# Altium PCB PCB1.PcbDoc
Units mm, origin at the board's own origin, x right, y up, seen from the top; angles counter-clockwise.
Board outline 26.5 x 80.6 mm, 2 copper layers (Top Layer, Bottom Layer), stack 0.571 mm thick; 10 components, 17 nets, 92 pads, 22 vias.
Unrouted connection lines stored in the file: 3.
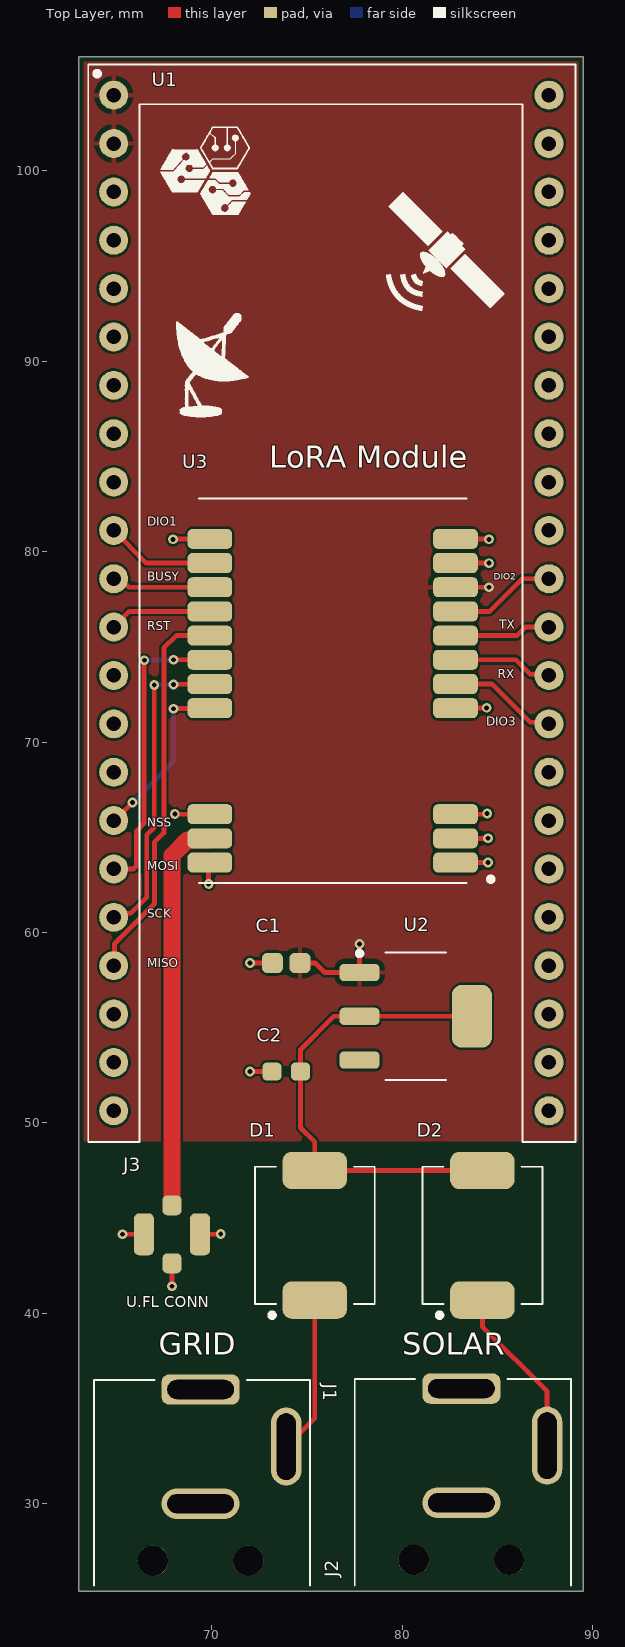
[diagram p0: Top Layer view]
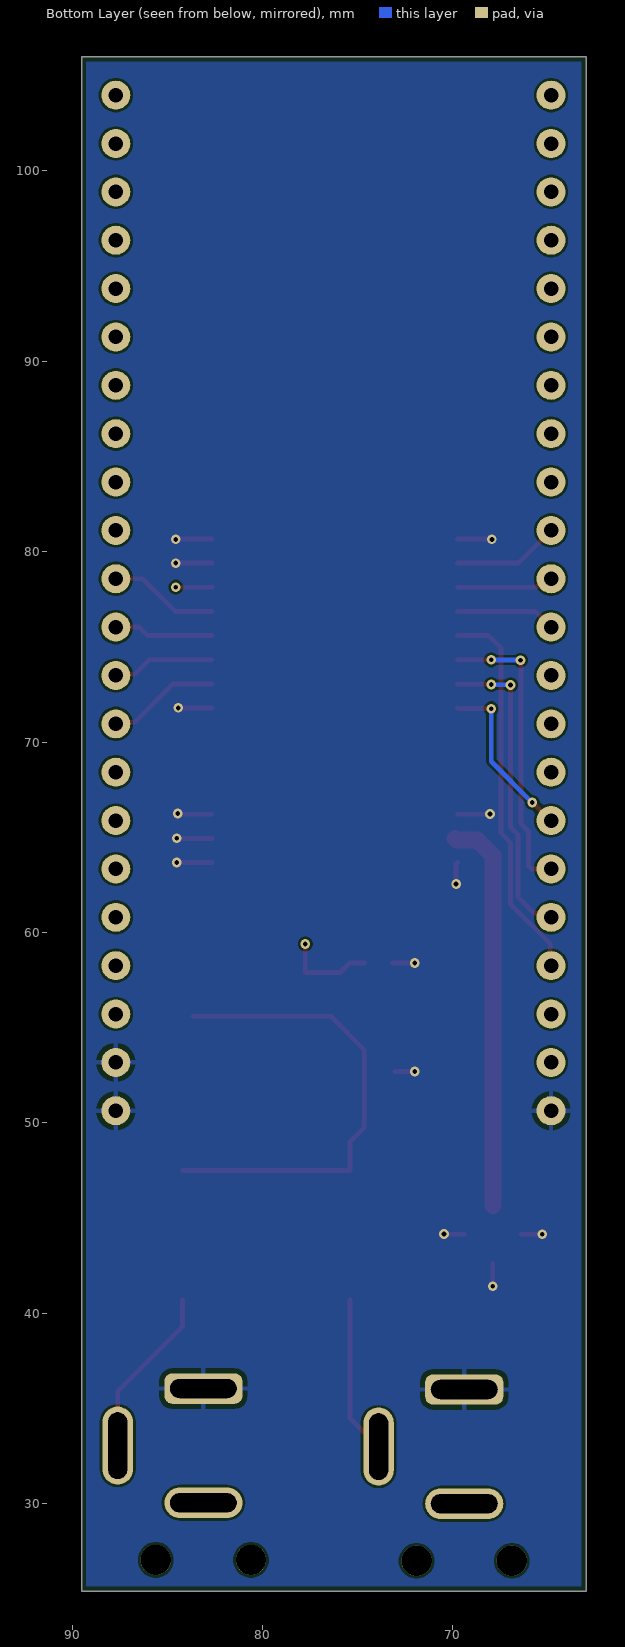
[diagram p1: Bottom Layer view, seen from below]

## Layer stack, top to bottom
Top Solder: solder mask 0.0102, Solder Resist, Dk 3.5
Top Layer: signal copper 0.0356
Dielectric 1: dielectric 0.5, FR-4, Dk 4.5
Bottom Layer: signal copper 0.0356
Bottom Solder: solder mask 0.0102, Solder Resist, Dk 3.5

## Board outline
63,25.4 63,106 89.5,106 89.5,25.4 89.4,25.4

## Design rules (kind name [scope] priority, off if disabled: settings)
BoardOutlineClearance [All] p1: gap=0.25 ignorepadtopadclearanceinfootprint=FALSE
Clearance [All] p1: gap=0.127 ignorepadtopadclearanceinfootprint=FALSE
HoleSize [All] p1: absolutevalues=TRUE maxlimit=6 minlimit=0.15 maxpercent=80.000 minpercent=20.000
MinimumSolderMaskSliver [All] p1: minsoldermaskwidth=0.1
PolygonConnect [All] p1: thpad.connectstyle=Relief thpad.reliefconductorwidth=0.254 thpad.reliefentries=4 thpad.polygonreliefangle="90 Angle" thpad.airgapwidth=0.254 smdpad.connectstyle=Relief smdpad.reliefconductorwidth=0.254 smdpad.reliefentries=4 smdpad.polygonreliefangle="90 Angle" smdpad.airgapwidth=0.254 via.connectstyle=Direct via.reliefconductorwidth=0.254 via.reliefentries=4 via.polygonreliefangle="90 Angle" via.airgapwidth=0.254
RoutingVias [All] p1: holewidth=0.254 width=0.508 viastyle="Through Hole" minholewidth=0.254 minwidth=0.508 maxholewidth=0.254 maxwidth=0.508
SolderMaskExpansion [All] p1: expansion=0.05 istentingtop=FALSE
SupplyNets "Schematic Supply Nets_3" [InNet('GND')] p1: voltage=0.000
SupplyNets "Schematic Supply Nets_2" [InNet('V_SOLAR')] p2: voltage=0.000
SupplyNets "Schematic Supply Nets_1" [InNet('V_WALL')] p3: voltage=0.000
SupplyNets "Schematic Supply Nets" [InNet('VCC')] p4: voltage=0.000
Width Width_Transmission [InNet('ANT')] p1: maxlimit=0.896 minlimit=0.896 preferedwidth=0.896 impedanceprofiledriven=TRUE impedanceprofileid={33A45208-CFB1-4BFC-A4CF-7B328319E742} impedanceprofilevalue=50.000000 minimp=50.000000 maximp=50.000000 favimp=50.000000
Width [All] p2: maxlimit=0.254 minlimit=0.254 preferedwidth=0.254
28 further rules are at their usual default settings.

## Components (designator, comment, footprint, x,y, rotation, side; value= is the part's Value field where it differs from the comment)
C1 "22µF" CL10A226MP8NUNE 73.9,58.4 r0 top
C2 "10µF" CL10A106KP8NNNC 73.9,52.7 r0 top
D1 "SS34" DO-214AB 75.4,44.1 r90 top
D2 "SS34" DO-214AB 84.2,44.1 r90 top
J1 "PJ-025" FP-PJ-025-MFG 69.4,29.25 r90 top locked
J2 "PJ-025" FP-PJ-025-MFG 83.1,29.3 r90 top locked
J3 "CONMHF1-SMD-T" TE_CONMHF1-SMD-T 67.9,44.15 r0 top
U1 "1965-ESP32-S3-DEVKITC1-N8R8-ND" ESP32-S3-DevKitC-1 76.27,77.31 r180 top locked
U2 "AMS1117-3.3" SOT-233-3L 80.7,55.6 r0 top
U3 "LR30-433M22S" DX-LR20-433M22S 76.34,72.7 r180 top

## Footprints (in the part's own frame and the unit in brackets; to place one, negate y for a bottom-side part, rotate by r counter-clockwise, add the part's x,y. Pads: shape width x height; smd on the part's side, far side on the other; paste and mask are expansions set on the pad)
CL10A106KP8NNNC [mm]
  rrect50% 1x0.95 smd: 1(-0.75,0) 2(0.75,0)
  body extent -0.85,-0.45 0.85,0.45, height 0.9
CL10A226MP8NUNE [mm]
  rrect50% 1.1x1.05 smd: 1(-0.725,0) 2(0.725,0)
  body extent -0.92,-0.53 0.92,0.53, height 1.05
DO-214AB [mm] "Molded Diode, 2-Leads, Body 6.88x5.90mm, IPC Medium Density"
  rrect50% 1.96x3.39 smd: 1(-3.405,0) 2(3.405,0)
  silkscreen extent -4.32,-3.15 3.6,3.15, body extent -3.79,-3.13 3.79,3.13, height 2.65
DX-LR20-433M22S [mm] "LCC, 22-Pins, Body 14.00x20.00mmx2.30mm, Pitch 1.27mm, IPC Medium Density"
  rrect50% 2.35x1.05 smd: 1(-6.45,9.025) 2(-6.45,7.755) 3(-6.45,6.485) 4(-6.45,0.915) 5(-6.45,-0.355) 6(-6.45,-1.625) 7(-6.45,-2.895) 8(-6.45,-4.165) 9(-6.45,-5.435) 10(-6.45,-6.705) 11(-6.45,-7.975) 12(6.45,-7.975) 13(6.45,-6.705) 14(6.45,-5.435) 15(6.45,-4.165) 16(6.45,-2.895) 17(6.45,-1.625) 18(6.45,-0.355) 19(6.45,0.915) 20(6.45,6.485) 21(6.45,7.755) 22(6.45,9.025)
  silkscreen extent -8.43,-10.1 7.02,10.1, body extent -7,-10 7,10, height 2.3
ESP32-S3-DevKitC-1 [mil]
  round 60 hole 30: 1(450,-1050) 2(450,-950) 3(450,-850) 4(450,-750) 5(450,-650) 6(450,-550) 7(450,-450) 8(450,-350) 9(450,-250) 10(450,-150) 11(450,-50) 12(450,50) 13(450,150) 14(450,250) 15(450,350) 16(450,450) 17(450,550) 18(450,650) 19(450,750) 20(450,850) 21(450,950) 22(450,1050) 23(-450,1050) 24(-450,950) 25(-450,850) 26(-450,750) 27(-450,650) 28(-450,550) 29(-450,450) 30(-450,350) 31(-450,250) 32(-450,150) 33(-450,50) 34(-450,-50) 35(-450,-150) 36(-450,-250) 37(-450,-350) 38(-450,-450) 39(-450,-550) 40(-450,-650) 41(-450,-750) 42(-450,-850) 43(-450,-950) 44(-450,-1050)
  silkscreen extent 479,-1099 489,-1089, body extent -500,-1110 500,1110, height 335
FP-PJ-025-MFG [mm]
  rrect50% 1.6x4.1 hole 3.5 slot 1 at 0 deg paste-2539.97 mask+0: 1(6.75,0)
  rrect100% 1.6x4.1 hole 3.5 slot 1 at 0 deg paste-2539.97 mask+0: 2(0.75,0)
  rrect100% 4.1x1.6 hole 1 slot 3.5 at 0 deg paste-2539.97 mask+0: 3(3.75,-4.5)
  round 1.6 hole 1.6 unplated paste-2539.97 mask+0: ""(-2.25,-2.5) ""(-2.25,2.5)
  silkscreen extent -3.55,-5.75 7.25,5.6, body extent -7.65,-5.7 7.65,5.7, height 0.25
SOT-233-3L [mm] "SOT223, 4-Leads, Body 6.30x7.00mm (avg), Pitch 2.30mm, IPC Medium Density"
  rrect50% 2.1x0.9 smd: 1(-2.95,2.3) 2(-2.95,0) 3(-2.95,-2.3)
  rrect50% 2.1x3.3 smd: 4(2.95,0)
  silkscreen extent -3.07,-3.35 1.6,3.42, body extent -3.5,-3.35 3.5,3.35, height 1.75
TE_CONMHF1-SMD-T [mm]
  rrect50% 1x1.05 smd: 1(0,1.525) 4(0,-1.525)
  rrect50% 1.05x2.2 smd: 2(-1.475,0) 3(1.475,0)
  body extent -1.5,-1.55 1.5,1.55, height 1.31

## Part data
C1: library part "CAP - GENERIC", "Ceramic Capacitor, Multilayer, Ceramic, 10V, 20% +Tol, 20% -Tol, X5R, +-15% TC, 22uF, Surface Mount, 0603 inch", .Case/Package=0603, .Voltage Rating (DC)=10V, Case Code (Metric)=1608, Dielectric=X5R, Dielectric Material=Ceramic, Manufacturer="Samsung Electro-Mechanics", Manufacturer Part Number=CL10A226MP8NUNE, Max Operating Temperature=85°C, Min Operating Temperature=-55°C, Supplier Part Number=1276-1274-1-ND, Tolerance=20%, Case Code (Imperial)=0603, Case/Package=0603, Category="Ceramic Capacitors", China RoHS=Compliant, ComponentLink1Description=https://datasheet.octopart.com:443/CL10A226MP8NUNE-Samsung-Electro-Mechanics-datasheet-136031767.pdf?src-supplier=Newark, ComponentLink1URL=https://datasheet.octopart.com:443/CL10A226MP8NUNE-Samsung-Electro-Mechanics-datasheet-136031767.pdf?src-supplier=Newark, ComponentLink2Description=https://datasheet.octopart.com:443/CL10A226MP8NUNE-Samsung-Electro-Mechanics-datasheet-81461803.pdf?src-supplier=Upverter, ComponentLink2URL=https://datasheet.octopart.com:443/CL10A226MP8NUNE-Samsung-Electro-Mechanics-datasheet-81461803.pdf?src-supplier=Upverter, ComponentLink3Description=https://datasheet.octopart.com:443/CL10A226MP8NUNE-Samsung-Electro-Mechanics-datasheet-141347088.pdf?src-supplier=Samsung+SCT, ComponentLink3URL=https://datasheet.octopart.com:443/CL10A226MP8NUNE-Samsung-Electro-Mechanics-datasheet-141347088.pdf?src-supplier=Samsung+SCT, ComponentLink4Description=https://datasheet.octopart.com:443/CL10A226MP8NUNE-Samsung-Electro-Mechanics-datasheet-130009137.pdf?src-supplier=Future+Electronics, ComponentLink4URL=https://datasheet.octopart.com:443/CL10A226MP8NUNE-Samsung-Electro-Mechanics-datasheet-130009137.pdf?src-supplier=Future+Electronics, ComponentLink5Description=https://datasheet.octopart.com:443/CL10A226MP8NUNE-Samsung-Electro-Mechanics-datasheet-87580102.pdf?src-supplier=Future+Electronics, ComponentLink5URL=https://datasheet.octopart.com:443/CL10A226MP8NUNE-Samsung-Electro-Mechanics-datasheet-87580102.pdf?src-supplier=Future+Electronics, ComponentLink6Description=https://datasheet.octopart.com:443/CL10A226MP8NUNE-Samsung-datasheet-44382853.pdf?src-supplier=Future+Electronics, ComponentLink6URL=https://datasheet.octopart.com:443/CL10A226MP8NUNE-Samsung-datasheet-44382853.pdf?src-supplier=Future+Electronics, ComponentLink7Description=https://datasheet.octopart.com:443/CL10A226MP8NUNE-Samsung-datasheet-34157779.pdf?src-supplier=Future+Electronics, ComponentLink7URL=https://datasheet.octopart.com:443/CL10A226MP8NUNE-Samsung-datasheet-34157779.pdf?src-supplier=Future+Electronics, ComponentLink8Description=https://datasheet.octopart.com:443/CL10A226MP8NUNE-Samsung-datasheet-26586486.pdf?src-supplier=Future+Electronics, ComponentLink8URL=https://datasheet.octopart.com:443/CL10A226MP8NUNE-Samsung-datasheet-26586486.pdf?src-supplier=Future+Electronics, ComponentLink9Description=https://datasheet.octopart.com:443/CL10A226MP8NUNE-Samsung-Electro-Mechanics-datasheet-149158798.pdf?src-supplier=Future+Electronics, ComponentLink9URL=https://datasheet.octopart.com:443/CL10A226MP8NUNE-Samsung-Electro-Mechanics-datasheet-149158798.pdf?src-supplier=Future+Electronics, ComponentLink10Description=https://datasheet.octopart.com:443/CL10A226MP8NUNE-Samsung-datasheet-8326407.pdf?src-supplier=TME, ComponentLink10URL=https://datasheet.octopart.com:443/CL10A226MP8NUNE-Samsung-datasheet-8326407.pdf?src-supplier=TME, Contact Plating=Tin, Depth=800µm, Height=1.05mm, Lead Free="Lead Free", Length=1.6mm, Lifecycle Status=Production, Mounting Technology="Surface Mount", Number of Terminals=2, Packaging="Tape & Reel", Pricing="1=0.08, 10=0.022, 50=0.022, 100=0.0216 (USD)", Radiation Hardening=No, REACH SVHC=Yes, RoHS=Compliant, Schedule B="8532240020, 8532240020|8532240020, 8532240020|8532240020|8532240020, 8532240020|8532240020|8532240020|8532240020", Stock=4274456, Supplier=DigiKey, Supplier 1=DigiKey, Supplier Part Number 1=1276-1274-1-ND, Thickness=889µm, Voltage Rating=10V, Voltage Rating (DC)=10V, Width=800µm
C2: library part "CAP - GENERIC", "Ceramic Capacitor, Multilayer, Ceramic, 10V, 10% +Tol, 10% -Tol, X5R, +-15% TC, 10uF, Surface Mount, 0603 inch", .Case/Package=0603, .Voltage Rating (DC)=10V, Case Code (Metric)=1608, Dielectric=X5R, Dielectric Material=Ceramic, Manufacturer="Samsung Electro-Mechanics", Manufacturer Part Number=CL10A106KP8NNNC, Max Operating Temperature=85°C, Min Operating Temperature=-55°C, Supplier Part Number=1276-1192-1-ND, Tolerance=10%, Case Code (Imperial)=0603, Case/Package=0603, Category="Ceramic Capacitors", China RoHS=Compliant, ComponentLink1Description=https://datasheet.octopart.com:443/CL10A106KP8NNNC-Samsung-Electro-Mechanics-datasheet-181960519.pdf?src-supplier=IHS, ComponentLink1URL=https://datasheet.octopart.com:443/CL10A106KP8NNNC-Samsung-Electro-Mechanics-datasheet-181960519.pdf?src-supplier=IHS, ComponentLink2Description=https://datasheet.octopart.com/CL10A106KP8NNNC-Samsung-Electro-Mechanics-datasheet-8324245.pdf, ComponentLink2URL=https://datasheet.octopart.com/CL10A106KP8NNNC-Samsung-Electro-Mechanics-datasheet-8324245.pdf, ComponentLink3Description=https://datasheet.octopart.com/CL10A106KP8NNNC-Samsung-Electro-Mechanics-datasheet-97040617.pdf, ComponentLink3URL=https://datasheet.octopart.com/CL10A106KP8NNNC-Samsung-Electro-Mechanics-datasheet-97040617.pdf, ComponentLink4Description=https://datasheet.octopart.com:443/CL10A106KP8NNNC-Samsung-Electro-Mechanics-datasheet-136031754.pdf?src-supplier=Future+Electronics, ComponentLink4URL=https://datasheet.octopart.com:443/CL10A106KP8NNNC-Samsung-Electro-Mechanics-datasheet-136031754.pdf?src-supplier=Future+Electronics, ComponentLink5Description=https://datasheet.octopart.com:443/CL10A106KP8NNNC-Samsung-Electro-Mechanics-datasheet-110226289.pdf?src-supplier=Future+Electronics, ComponentLink5URL=https://datasheet.octopart.com:443/CL10A106KP8NNNC-Samsung-Electro-Mechanics-datasheet-110226289.pdf?src-supplier=Future+Electronics, ComponentLink6Description=https://datasheet.octopart.com:443/CL10A106KP8NNNC-Samsung-Electro-Mechanics-datasheet-81461787.pdf?src-supplier=Future+Electronics, ComponentLink6URL=https://datasheet.octopart.com:443/CL10A106KP8NNNC-Samsung-Electro-Mechanics-datasheet-81461787.pdf?src-supplier=Future+Electronics, ComponentLink7Description=https://datasheet.octopart.com:443/CL10A106KP8NNNC-Samsung-datasheet-48647232.pdf?src-supplier=Future+Electronics, ComponentLink7URL=https://datasheet.octopart.com:443/CL10A106KP8NNNC-Samsung-datasheet-48647232.pdf?src-supplier=Future+Electronics, ComponentLink8Description=https://datasheet.octopart.com:443/CL10A106KP8NNNC-Samsung-datasheet-34157262.pdf?src-supplier=Future+Electronics, ComponentLink8URL=https://datasheet.octopart.com:443/CL10A106KP8NNNC-Samsung-datasheet-34157262.pdf?src-supplier=Future+Electronics, ComponentLink9Description=https://datasheet.octopart.com:443/CL10A106KP8NNNC-Samsung-datasheet-26589120.pdf?src-supplier=Future+Electronics, ComponentLink9URL=https://datasheet.octopart.com:443/CL10A106KP8NNNC-Samsung-datasheet-26589120.pdf?src-supplier=Future+Electronics, ComponentLink10Description=https://datasheet.octopart.com:443/CL10A106KP8NNNC-Samsung-Electro-Mechanics-datasheet-149156481.pdf?src-supplier=Future+Electronics, ComponentLink10URL=https://datasheet.octopart.com:443/CL10A106KP8NNNC-Samsung-Electro-Mechanics-datasheet-149156481.pdf?src-supplier=Future+Electronics, ComponentLink11Description=https://datasheet.octopart.com:443/CL10A106KP8NNNC-Samsung-Electro-Mechanics-datasheet-11968064.pdf?src-supplier=Arrow+Electronics, ComponentLink11URL=https://datasheet.octopart.com:443/CL10A106KP8NNNC-Samsung-Electro-Mechanics-datasheet-11968064.pdf?src-supplier=Arrow+Electronics, ComponentLink12Description=https://datasheet.octopart.com:443/CL10A106KP8NNNC-Samsung-datasheet-8326407.pdf?src-supplier=TME, ComponentLink12URL=https://datasheet.octopart.com:443/CL10A106KP8NNNC-Samsung-datasheet-8326407.pdf?src-supplier=TME, Contact Plating=Tin, Depth=800µm, Height=800µm, Lead Free="Lead Free", Length=1.6mm, Lifecycle Status=Production, Material=Ceramic, Mounting Technology="Surface Mount", Number of Terminals=2, Pricing="1=0.08, 10=0.022 (USD)", Radiation Hardening=No, REACH SVHC=Yes, RoHS=Compliant, Schedule B="8532240020, 8532240020|8532240020|8532240020|8532240020|8532240020|8532240020|8532240020|8532240020|8532240020|8532240020|8532240020|8532240020|8532240020|8532240020|8532240020|8532240020|8532240020|8532240020|8532240020|8532240020|8532240020|8532240020|8532240020|85", Stock=1064834, Supplier=DigiKey, Thickness=889µm, Voltage Rating=10V, Voltage Rating (DC)=10V, Width=800µm
D1 D2: library part "DIODE SCHOTTKY", "Rectifier Diode, Schottky, 1 Phase, 1 Element, 3A, 40V V(RRM), Silicon, DO-214AB", .Case/Package=SMC, .Current=3A, Forward Voltage=500mV, Manufacturer=onsemi, Manufacturer Lifecycle Status=ACTIVE, Max Forward Surge Current (Ifsm)=100A, Max Junction Temperature (Tj)=150°C, Max Power Dissipation=2.27W, Max Repetitive Reverse Voltage (Vrrm)=40V, Max Reverse Leakage Current=500µA, Min Operating Temperature=-55°C, Peak Reverse Current=20mA, Supplier Part Number=SS34FSCT-ND, Average Rectified Current=3A, Case/Package=SMC, Category="Schottky Diodes", China RoHS=Non-Compliant, ComponentLink1Description=https://datasheet.octopart.com:443/SS34-onsemi-datasheet-180969540.pdf?src-supplier=IHS, ComponentLink1URL=https://datasheet.octopart.com:443/SS34-onsemi-datasheet-180969540.pdf?src-supplier=IHS, ComponentLink2Description=https://datasheet.octopart.com:443/SS34-Fairchild-Semiconductor-datasheet-182300316.pdf?src-supplier=IHS, ComponentLink2URL=https://datasheet.octopart.com:443/SS34-Fairchild-Semiconductor-datasheet-182300316.pdf?src-supplier=IHS, ComponentLink3Description=https://datasheet.octopart.com:443/SS34-ON-Semiconductor-datasheet-98150820.pdf?src-supplier=Upverter, ComponentLink3URL=https://datasheet.octopart.com:443/SS34-ON-Semiconductor-datasheet-98150820.pdf?src-supplier=Upverter, ComponentLink4Description=https://sigma.octopart.com:443/138897342/technical_drawing/ON-Semiconductor-SS34.pdf?src-supplier=Upverter, ComponentLink4URL=https://sigma.octopart.com:443/138897342/technical_drawing/ON-Semiconductor-SS34.pdf?src-supplier=Upverter, ComponentLink5Description=https://datasheet.octopart.com:443/SS34-Fairchild-datasheet-10247.pdf?src-supplier=Fairchild+Semiconductor, ComponentLink5URL=https://datasheet.octopart.com:443/SS34-Fairchild-datasheet-10247.pdf?src-supplier=Fairchild+Semiconductor, ComponentLink6Description=https://datasheet.octopart.com:443/SS34-ON-Semiconductor-datasheet-21199498.pdf?src-supplier=Fairchild+Semiconductor, ComponentLink6URL=https://datasheet.octopart.com:443/SS34-ON-Semiconductor-datasheet-21199498.pdf?src-supplier=Fairchild+Semiconductor, ComponentLink7Description=https://sigma.octopart.com:443/17345394/technical_drawing/Fairchild-Semiconductor-SS34.pdf?src-supplier=Fairchild+Semiconductor, ComponentLink7URL=https://sigma.octopart.com:443/17345394/technical_drawing/Fairchild-Semiconductor-SS34.pdf?src-supplier=Fairchild+Semiconductor, ComponentLink8Description=https://datasheet.octopart.com:443/SS34-ON-Semiconductor-datasheet-137362514.pdf?src-supplier=onsemi, ComponentLink8URL=https://datasheet.octopart.com:443/SS34-ON-Semiconductor-datasheet-137362514.pdf?src-supplier=onsemi, ComponentLink9Description=https://datasheet.octopart.com:443/SS34-ON-Semiconductor-datasheet-85599191.pdf?src-supplier=onsemi, ComponentLink9URL=https://datasheet.octopart.com:443/SS34-ON-Semiconductor-datasheet-85599191.pdf?src-supplier=onsemi, ComponentLink10Description=https://datasheet.octopart.com:443/SS34-ON-Semiconductor-datasheet-86698610.pdf?src-supplier=onsemi, ComponentLink10URL=https://datasheet.octopart.com:443/SS34-ON-Semiconductor-datasheet-86698610.pdf?src-supplier=onsemi, ComponentLink11Description=https://datasheet.octopart.com:443/SS34-ON-Semiconductor-datasheet-86692994.pdf?src-supplier=Farnell, ComponentLink11URL=https://datasheet.octopart.com:443/SS34-ON-Semiconductor-datasheet-86692994.pdf?src-supplier=Farnell, ComponentLink12Description=https://datasheet.octopart.com:443/SS34-Fairchild-Semiconductor-datasheet-16207785.pdf?src-supplier=Farnell, ComponentLink12URL=https://datasheet.octopart.com:443/SS34-Fairchild-Semiconductor-datasheet-16207785.pdf?src-supplier=Farnell, ComponentLink13Description=https://datasheet.octopart.com:443/SS34-Fairchild-Semiconductor-datasheet-17852663.pdf?src-supplier=Newark, ComponentLink13URL=https://datasheet.octopart.com:443/SS34-Fairchild-Semiconductor-datasheet-17852663.pdf?src-supplier=Newark, ComponentLink14Description=https://datasheet.octopart.com:443/SS34-Fairchild-Semiconductor-datasheet-66805556.pdf?src-supplier=Newark, ComponentLink14URL=https://datasheet.octopart.com:443/SS34-Fairchild-Semiconductor-datasheet-66805556.pdf?src-supplier=Newark, ComponentLink15Description=https://datasheet.octopart.com:443/SS34-ON-Semiconductor-datasheet-137713514.pdf?src-supplier=TME, ComponentLink15URL=https://datasheet.octopart.com:443/SS34-ON-Semiconductor-datasheet-137713514.pdf?src-supplier=TME, ComponentLink16Description=https://datasheet.octopart.com:443/SS34-Fairchild-Semiconductor-datasheet-10520288.pdf?src-supplier=Jameco, ComponentLink16URL=https://datasheet.octopart.com:443/SS34-Fairchild-Semiconductor-datasheet-10520288.pdf?src-supplier=Jameco, ComponentLink17Description=https://datasheet.octopart.com:443/SS34.-Fairchild-Semiconductor-datasheet-8187732.pdf?src-supplier=Jameco, ComponentLink17URL=https://datasheet.octopart.com:443/SS34.-Fairchild-Semiconductor-datasheet-8187732.pdf?src-supplier=Jameco, ComponentLink18Description=https://datasheet.octopart.com:443/SS34-Fairchild-Semiconductor-datasheet-14041527.pdf?src-supplier=iiiC, ComponentLink18URL=https://datasheet.octopart.com:443/SS34-Fairchild-Semiconductor-datasheet-14041527.pdf?src-supplier=iiiC, ComponentLink19Description=https://datasheet.octopart.com:443/SS34-Fairchild-datasheet-3545.pdf?src-supplier=DigiKey, ComponentLink19URL=https://datasheet.octopart.com:443/SS34-Fairchild-datasheet-3545.pdf?src-supplier=DigiKey, ComponentLink20Description=https://datasheet.octopart.com:443/SS34-Fairchild-Semiconductor-datasheet-67150810.pdf?src-supplier=element14+APAC, ComponentLink20URL=https://datasheet.octopart.com:443/SS34-Fairchild-Semiconductor-datasheet-67150810.pdf?src-supplier=element14+APAC, ComponentLink21Description=https://datasheet.octopart.com:443/SS34-Fairchild-Semiconductor-datasheet-67301494.pdf?src-supplier=element14+APAC, ComponentLink21URL=https://datasheet.octopart.com:443/SS34-Fairchild-Semiconductor-datasheet-67301494.pdf?src-supplier=element14+APAC, ComponentLink22Description=https://datasheet.octopart.com:443/SS34-Fairchild-Semiconductor-datasheet-68552117.pdf?src-supplier=element14+APAC, ComponentLink22URL=https://datasheet.octopart.com:443/SS34-Fairchild-Semiconductor-datasheet-68552117.pdf?src-supplier=element14+APAC, ComponentLink23Description=http://sigma.octopart.com:80/150631730/rohs_statement/ON-Semiconductor-SS34.pdf?src-supplier=Compliance+Statements, ComponentLink23URL=http://sigma.octopart.com:80/150631730/rohs_statement/ON-Semiconductor-SS34.pdf?src-supplier=Compliance+Statements, ComponentLink24Description=http://sigma.octopart.com:80/17357496/reach_statement/Fairchild-Semiconductor-SS34.pdf?src-supplier=Compliance+Statements, ComponentLink24URL=http://sigma.octopart.com:80/17357496/reach_statement/Fairchild-Semiconductor-SS34.pdf?src-supplier=Compliance+Statements, ComponentLink25Description=http://sigma.octopart.com:80/17357497/materials_sheet/Fairchild-Semiconductor-SS34.pdf?src-supplier=Compliance+Statements, ComponentLink25URL=http://sigma.octopart.com:80/17357497/materials_sheet/Fairchild-Semiconductor-SS34.pdf?src-supplier=Compliance+Statements, ComponentLink26Description=http://sigma.octopart.com:80/33332724/reach_statement/Fairchild-Semiconductor-SS34.pdf?src-supplier=Compliance+Statements, ComponentLink26URL=http://sigma.octopart.com:80/33332724/reach_statement/Fairchild-Semiconductor-SS34.pdf?src-supplier=Compliance+Statements, ComponentLink27Description=http://sigma.octopart.com:80/33332734/materials_sheet/Fairchild-Semiconductor-SS34.pdf?src-supplier=Compliance+Statements, ComponentLink27URL=http://sigma.octopart.com:80/33332734/materials_sheet/Fairchild-Semiconductor-SS34.pdf?src-supplier=Compliance+Statements, ComponentLink28Description=http://sigma.octopart.com:80/reach_statement/ON-Semiconductor-company-79.pdf?src-supplier=Compliance+Statements, ComponentLink28URL=http://sigma.octopart.com:80/reach_statement/ON-Semiconductor-company-79.pdf?src-supplier=Compliance+Statements, ComponentLink29Description=http://sigma.octopart.com:80/reach_statement/Fairchild-Semiconductor-company-9.pdf?src-supplier=Compliance+Statements, ComponentLink29URL=http://sigma.octopart.com:80/reach_statement/Fairchild-Semiconductor-company-9.pdf?src-supplier=Compliance+Statements, ComponentLink30Description=http://sigma.octopart.com:80/rohs_statement/Fairchild-Semiconductor-company-10.pdf?src-supplier=Compliance+Statements, ComponentLink30URL=http://sigma.octopart.com:80/rohs_statement/Fairchild-Semiconductor-company-10.pdf?src-supplier=Compliance+Statements, ComponentLink31Description=http://sigma.octopart.com:80/rohs_statement/Fairchild-Semiconductor-company-11.pdf?src-supplier=Compliance+Statements, ComponentLink31URL=http://sigma.octopart.com:80/rohs_statement/Fairchild-Semiconductor-company-11.pdf?src-supplier=Compliance+Statements, ComponentLink32Description=https://octopart.com:443/opatz8j6/c1?t=INGNMSvkQzVaBftfMdbdGWXMLt-3xnwhog-ReOYmqtUrFiLTMM4D1Vzme83LcZQAOc5Mnk4pcKN9Ly-JYTT_1sGEZYxulTTxgxyg3oFTQs_utIoSDouAvXLKqhpGEfYGEXWBIHn1cFCZcxwfF151GOu0ePedhnht2_2MQKik45tp4E4znP6u56ieixUXcsoEpGU3-yGv0UW3Kc46Jvhj_LZ4KJvA_-kHwT-AD9KCusjqUtMoF3JFJWub5WofAzQQZYdP2Y4CWeNUtTwLdi9m9bYyloNpS_LyLQqlAVLgfNWz2j9Xm0nb9VhTQPqtDT13f1RvYt0s1OHrd6U75ko39-Eob5tCrA&src-supplier=Compliance+Statements, ComponentLink32URL=https://octopart.com:443/opatz8j6/c1?t=INGNMSvkQzVaBftfMdbdGWXMLt-3xnwhog-ReOYmqtUrFiLTMM4D1Vzme83LcZQAOc5Mnk4pcKN9Ly-JYTT_1sGEZYxulTTxgxyg3oFTQs_utIoSDouAvXLKqhpGEfYGEXWBIHn1cFCZcxwfF151GOu0ePedhnht2_2MQKik45tp4E4znP6u56ieixUXcsoEpGU3-yGv0UW3Kc46Jvhj_LZ4KJvA_-kHwT-AD9KCusjqUtMoF3JFJWub5WofAzQQZYdP2Y4CWeNUtTwLdi9m9bYyloNpS_LyLQqlAVLgfNWz2j9Xm0nb9VhTQPqtDT13f1RvYt0s1OHrd6U75ko39-Eob5tCrA&src-supplier=Compliance+Statements, ComponentLink33Description=https://octopart.com:443/opatz8j6/c1?t=wIGVuj3Dee-fijDzTBmUUbxDpc_yGXA-vpwAtgeNAMiJFylbZhnYzVjc2DY0Cod1ZKWCSvEYdmwymMUBdClGLvRgzvtA_D3kTsgd6LNlabVyHPn0KLls_3gHwPBaI-7_HdWXzwpvHS8EYa4P-8pQNVCRgIp-_e5aKxbnN9X_MqE7dgvhaUsKJk6k7zEN-JKaJzTgSUTZ7PM46V6sGlMXXs2i8l8oUSpQOtzuGCWE_eqOCBSPpKFPOz7Kvx7R4hUcGhgrZscjd93lUiuoabAsyaFNvEBUssVMHXzbtIZD3xK0wsSli0HmnRmlImw4jIx3s-EM5Io88uslMlIxy-TtPhH9bKOU8RQ&src-supplier=Compliance+Statements, ComponentLink33URL=https://octopart.com:443/opatz8j6/c1?t=wIGVuj3Dee-fijDzTBmUUbxDpc_yGXA-vpwAtgeNAMiJFylbZhnYzVjc2DY0Cod1ZKWCSvEYdmwymMUBdClGLvRgzvtA_D3kTsgd6LNlabVyHPn0KLls_3gHwPBaI-7_HdWXzwpvHS8EYa4P-8pQNVCRgIp-_e5aKxbnN9X_MqE7dgvhaUsKJk6k7zEN-JKaJzTgSUTZ7PM46V6sGlMXXs2i8l8oUSpQOtzuGCWE_eqOCBSPpKFPOz7Kvx7R4hUcGhgrZscjd93lUiuoabAsyaFNvEBUssVMHXzbtIZD3xK0wsSli0HmnRmlImw4jIx3s-EM5Io88uslMlIxy-TtPhH9bKOU8RQ&src-supplier=Compliance+Statements, Contact Plating=Tin, Current=3A, Current Rating=3A, Element Configuration=Single, Forward Current=3A, Height=2.65mm, Lead Free="Lead Free", Length=7.15mm, Lifecycle Status=Production, Manufacturer Part Number=SS34, Max Operating Temperature=150°C, Max Output current=3A, Max Reverse Voltage (DC)=40V, Max Surge Current=100A, Mounting Technology="Surface Mount", Number of Elements=1, Number of Terminals=2, Output Current=3A, Packaging="Cut Tape", Peak Non-Repetitive Surge Current=100A, Pins=2, Polarity=Standard, Pricing="1=0.67, 10=0.435, 100=0.3804, 500=0.29238, 1000=0.26402 (USD)", Radiation Hardening=No, REACH SVHC=No, Reverse Standoff Voltage=40V, RoHS=Compliant, Schedule B="8541100080, 8541100080|8541100080|8541100080|8541100080|8541100080", Stock=32334, Supplier=DigiKey, Supplier 1=DigiKey, Supplier Part Number 1=SS34FSCT-ND, VOLTAGE=40V, Voltage Rating (DC)=40V, Width=6.25mm
J1 J2: "4.0 x 7.0 mm, 3.0 A, Horizontal, Through Hole, Kinked Pins, Dc Power Jack Connector", Current Rating=3A, Manufacturer="Same Sky", Supplier Part Number 1=CP-025-ND, Voltage Rating=24V, Category="Power Connectors", ComponentLink1Description=https://datasheet.octopart.com:443/PJ-025-Same-Sky-datasheet-188904093.pdf?src-supplier=Same+Sky, ComponentLink1URL=https://datasheet.octopart.com:443/PJ-025-Same-Sky-datasheet-188904093.pdf?src-supplier=Same+Sky, ComponentLink2Description=https://datasheet.octopart.com:443/PJ-025-Same-Sky-datasheet-181917259.pdf?src-supplier=Same+Sky, ComponentLink2URL=https://datasheet.octopart.com:443/PJ-025-Same-Sky-datasheet-181917259.pdf?src-supplier=Same+Sky, ComponentLink3Description=https://datasheet.octopart.com:443/PJ-025-Same-Sky-datasheet-181917258.pdf?src-supplier=Same+Sky, ComponentLink3URL=https://datasheet.octopart.com:443/PJ-025-Same-Sky-datasheet-181917258.pdf?src-supplier=Same+Sky, ComponentLink4Description=https://datasheet.octopart.com:443/PJ-025-CUI-Devices-datasheet-175924733.pdf?src-supplier=Same+Sky, ComponentLink4URL=https://datasheet.octopart.com:443/PJ-025-CUI-Devices-datasheet-175924733.pdf?src-supplier=Same+Sky, ComponentLink5Description=https://datasheet.octopart.com:443/PJ-025-CUI-Devices-datasheet-137940876.pdf?src-supplier=Same+Sky, ComponentLink5URL=https://datasheet.octopart.com:443/PJ-025-CUI-Devices-datasheet-137940876.pdf?src-supplier=Same+Sky, ComponentLink6Description=https://datasheet.octopart.com:443/PJ-025-CUI-Devices-datasheet-180437258.pdf?src-supplier=IHS, ComponentLink6URL=https://datasheet.octopart.com:443/PJ-025-CUI-Devices-datasheet-180437258.pdf?src-supplier=IHS, ComponentLink7Description=https://datasheet.octopart.com:443/PJ-025-Same-Sky-datasheet-190141965.pdf?src-supplier=element14+APAC, ComponentLink7URL=https://datasheet.octopart.com:443/PJ-025-Same-Sky-datasheet-190141965.pdf?src-supplier=element14+APAC, ComponentLink8Description=https://datasheet.octopart.com:443/PJ-025-Same-Sky-datasheet-182880889.pdf?src-supplier=Electro+Sonic, ComponentLink8URL=https://datasheet.octopart.com:443/PJ-025-Same-Sky-datasheet-182880889.pdf?src-supplier=Electro+Sonic, ComponentLink9Description=https://datasheet.octopart.com:443/PJ-025-CUI-Devices-datasheet-175925554.pdf?src-supplier=Master+Electronics, ComponentLink9URL=https://datasheet.octopart.com:443/PJ-025-CUI-Devices-datasheet-175925554.pdf?src-supplier=Master+Electronics, ComponentLink10Description=https://datasheet.octopart.com:443/PJ-025-CUI-Devices-datasheet-141000199.pdf?src-supplier=Master+Electronics, ComponentLink10URL=https://datasheet.octopart.com:443/PJ-025-CUI-Devices-datasheet-141000199.pdf?src-supplier=Master+Electronics, ComponentLink11Description=https://datasheet.octopart.com:443/PJ-025-CUI-Devices-datasheet-103109417.pdf?src-supplier=Master+Electronics, ComponentLink11URL=https://datasheet.octopart.com:443/PJ-025-CUI-Devices-datasheet-103109417.pdf?src-supplier=Master+Electronics, ComponentLink12Description=https://datasheet.octopart.com:443/PJ-025-Same-Sky-datasheet-189105144.pdf?src-supplier=Master+Electronics, ComponentLink12URL=https://datasheet.octopart.com:443/PJ-025-Same-Sky-datasheet-189105144.pdf?src-supplier=Master+Electronics, ComponentLink13Description=https://datasheet.octopart.com:443/PJ-025-Same-Sky-datasheet-182049815.pdf?src-supplier=Future+Electronics, ComponentLink13URL=https://datasheet.octopart.com:443/PJ-025-Same-Sky-datasheet-182049815.pdf?src-supplier=Future+Electronics, ComponentLink14Description=https://datasheet.octopart.com:443/PJ-025-CUI-Devices-datasheet-175929693.pdf?src-supplier=Future+Electronics, ComponentLink14URL=https://datasheet.octopart.com:443/PJ-025-CUI-Devices-datasheet-175929693.pdf?src-supplier=Future+Electronics, ComponentLink15Description=https://datasheet.octopart.com:443/PJ-025-CUI-Devices-datasheet-175925267.pdf?src-supplier=Future+Electronics, ComponentLink15URL=https://datasheet.octopart.com:443/PJ-025-CUI-Devices-datasheet-175925267.pdf?src-supplier=Future+Electronics, ComponentLink16Description=https://datasheet.octopart.com:443/PJ-025-CUI-Devices-datasheet-169538540.pdf?src-supplier=Future+Electronics, ComponentLink16URL=https://datasheet.octopart.com:443/PJ-025-CUI-Devices-datasheet-169538540.pdf?src-supplier=Future+Electronics, ComponentLink17Description=https://datasheet.octopart.com:443/PJ-025-CUI-Devices-datasheet-140871789.pdf?src-supplier=Future+Electronics, ComponentLink17URL=https://datasheet.octopart.com:443/PJ-025-CUI-Devices-datasheet-140871789.pdf?src-supplier=Future+Electronics, ComponentLink18Description=https://datasheet.octopart.com:443/PJ-025-CUI-Devices-datasheet-175927549.pdf?src-supplier=CUI+Devices+SCT, ComponentLink18URL=https://datasheet.octopart.com:443/PJ-025-CUI-Devices-datasheet-175927549.pdf?src-supplier=CUI+Devices+SCT, ComponentLink19Description=https://datasheet.octopart.com:443/PJ-025-CUI-Devices-datasheet-142370643.pdf?src-supplier=CUI+Devices+SCT, ComponentLink19URL=https://datasheet.octopart.com:443/PJ-025-CUI-Devices-datasheet-142370643.pdf?src-supplier=CUI+Devices+SCT, ComponentLink20Description=https://octopart.com:443/opatz8j6/c1?t=A0sbCVernK5m6E0oQdfBuOlo-IfxzwFD9W94eDtR9FzbMKSQ30DzPkp28GyrtlK3tg6a678tHXSGnsaZ71HaKTUWUp33VL5zL0lCBTPZsgdHpmDtPeC6y7DllqeA-ue4bZVI5bam5oBHX_iQa9kvhtNSdJkb01QPj5k-7gXenO_MfCsngz6ampY6lLVZ4iJWfH3FycRTyGEHh3Setix357tmXNJehefUO1VmTnPiLIGc8UPvABZXLJUlYIJb13duFCRtdKUzS4CC4vaKxfVBZYbQan6_35wLyj4MgBpnwDOkEaqTamJhuLzjvfyhwJghlw5MLBvx6NGptAKZC1B8WFMZhlSzOf5b&src-supplier=Compliance+Statements, ComponentLink20URL=https://octopart.com:443/opatz8j6/c1?t=A0sbCVernK5m6E0oQdfBuOlo-IfxzwFD9W94eDtR9FzbMKSQ30DzPkp28GyrtlK3tg6a678tHXSGnsaZ71HaKTUWUp33VL5zL0lCBTPZsgdHpmDtPeC6y7DllqeA-ue4bZVI5bam5oBHX_iQa9kvhtNSdJkb01QPj5k-7gXenO_MfCsngz6ampY6lLVZ4iJWfH3FycRTyGEHh3Setix357tmXNJehefUO1VmTnPiLIGc8UPvABZXLJUlYIJb13duFCRtdKUzS4CC4vaKxfVBZYbQan6_35wLyj4MgBpnwDOkEaqTamJhuLzjvfyhwJghlw5MLBvx6NGptAKZC1B8WFMZhlSzOf5b&src-supplier=Compliance+Statements, ComponentLink21Description=https://octopart.com:443/opatz8j6/c1?t=c2-mXJBM8tR3Kjq7hbudDC0By4QcG-KdykyuhLDaFVDplXHpyOpW2busuNoGB__MV4F3E9sW7p8LZI_VkqyFY41C89rfhmyqZqCM_u-QqD7ecXKUqrgRgCVWuJjHsxAua9Z4iSBucFMy4MG2WTavCzu9oUA5ULAJEM7aYKqoC6TNfygjE0IJjwBWDnTl8itnuDETukSRB0nDHAN2qrZSPjcJC1wXMD8SXA3G63lJKS_6tTlXQAHAZ86ZpnOImctSyyjYAII9YUOMOvBBRSUKMVViV3T3yFtM4vuLMtE3mJIDNNGpyDSiPPE44EF7bOfc8C0JBdMv4eFyZzzrENoYYgoLkQc&src-supplier=Compliance+Statements, ComponentLink21URL=https://octopart.com:443/opatz8j6/c1?t=c2-mXJBM8tR3Kjq7hbudDC0By4QcG-KdykyuhLDaFVDplXHpyOpW2busuNoGB__MV4F3E9sW7p8LZI_VkqyFY41C89rfhmyqZqCM_u-QqD7ecXKUqrgRgCVWuJjHsxAua9Z4iSBucFMy4MG2WTavCzu9oUA5ULAJEM7aYKqoC6TNfygjE0IJjwBWDnTl8itnuDETukSRB0nDHAN2qrZSPjcJC1wXMD8SXA3G63lJKS_6tTlXQAHAZ86ZpnOImctSyyjYAII9YUOMOvBBRSUKMVViV3T3yFtM4vuLMtE3mJIDNNGpyDSiPPE44EF7bOfc8C0JBdMv4eFyZzzrENoYYgoLkQc&src-supplier=Compliance+Statements, ComponentLink22Description=https://octopart.com:443/opatz8j6/c1?t=smHv0KYRv6K2EsiSAEbAEJonZi5QzaXDSVdCEfP7SsPZ15JO-nG_DAfjmdA2TgliyuarNm0-qZA0NJmy99FQtVRSqKpcekJiLCEoGpMJ0yp0hHiogO_nfs0m1J74TE68VnieCMkqJqwBEkMnQWBbM0NCuiF4bcHbxY0gE7h61DF1DuejXr_B_O4jgHVx22ARvvKHcihjkoQ9_i6GsrfDWL9syulZaci3DBJynFX0ER4JonVx08f2b0ScNxJSGe5Fqtec_XUzZBXJnoXKZOYZJII4kAk_WXrnhrSiF3GonmrzlLxeHiIn5wo-g_q3nQmvHlxGexzt0A-lDhuLaGib5M5avHi1GOLX&src-supplier=Compliance+Statements, ComponentLink22URL=https://octopart.com:443/opatz8j6/c1?t=smHv0KYRv6K2EsiSAEbAEJonZi5QzaXDSVdCEfP7SsPZ15JO-nG_DAfjmdA2TgliyuarNm0-qZA0NJmy99FQtVRSqKpcekJiLCEoGpMJ0yp0hHiogO_nfs0m1J74TE68VnieCMkqJqwBEkMnQWBbM0NCuiF4bcHbxY0gE7h61DF1DuejXr_B_O4jgHVx22ARvvKHcihjkoQ9_i6GsrfDWL9syulZaci3DBJynFX0ER4JonVx08f2b0ScNxJSGe5Fqtec_XUzZBXJnoXKZOYZJII4kAk_WXrnhrSiF3GonmrzlLxeHiIn5wo-g_q3nQmvHlxGexzt0A-lDhuLaGib5M5avHi1GOLX&src-supplier=Compliance+Statements, ComponentLink23Description=https://octopart.com:443/opatz8j6/c1?t=T-9NMOOmMCBumrJ4ofLIwO6sYIeVX2GmB67aR6rYzZa61D91D97aNJhLyKA6cyghCBJVV-et-Hjb1f97oC-DkCqKzDixE10qv7Rrb6pj_epDJ_hQwP_0WcLiOcm5ZVMR6saKpBF2yBdo4x7UTHrWdRnZj68s1zDExKA1xSIX57nWl8TgxkiOiA2gHALyxvhUm0XzYDxyuVyyKnwSH7Q44qGaCXWRzb1EkKqiFFuyK6580KrjN5zyAv9X6G5v6d3_NK_l61qPVneKAerAxhfpHxi8yz7u_MO5fXOrenIC07MzR_1OmhuS-gg7t__qvGtNsTauRLKC7xbET8pBFp3mjZpripI&src-supplier=Compliance+Statements, ComponentLink23URL=https://octopart.com:443/opatz8j6/c1?t=T-9NMOOmMCBumrJ4ofLIwO6sYIeVX2GmB67aR6rYzZa61D91D97aNJhLyKA6cyghCBJVV-et-Hjb1f97oC-DkCqKzDixE10qv7Rrb6pj_epDJ_hQwP_0WcLiOcm5ZVMR6saKpBF2yBdo4x7UTHrWdRnZj68s1zDExKA1xSIX57nWl8TgxkiOiA2gHALyxvhUm0XzYDxyuVyyKnwSH7Q44qGaCXWRzb1EkKqiFFuyK6580KrjN5zyAv9X6G5v6d3_NK_l61qPVneKAerAxhfpHxi8yz7u_MO5fXOrenIC07MzR_1OmhuS-gg7t__qvGtNsTauRLKC7xbET8pBFp3mjZpripI&src-supplier=Compliance+Statements, ComponentLink24Description=https://octopart.com:443/opatz8j6/c1?t=KvmM_VB597wQBZ0EFQPHsqthghnk-CyKJREKVm4-BDXmbtmDbIPXrgVDpL1D_aH_vnWAURhYsNjLM_wr8Sk9hjyk0XVYi62MVHONNwuLkuQfcs2d_AabwFAe876Z4ACeuShE7C090wiuQhW4jcmNrxJGoMTa6mNLLVS96SYx4do0OhlkfAj24S1WZ0GsIWguWcbfpf-cmY33Q4b-vxROzlpdDoTdAyy_qjxrfJFClswfFE-i-iVByVygRjjILC3nYwzEIjO0c9zvWRVgAPawcsrWqWG3mS_gkNhm4Qnvw1r-XroZnlSa1hwEgAiWWj5WXGwF_kqFHmXIh0noM3HnOQZrxRrI52p4&src-supplier=Compliance+Statements, ComponentLink24URL=https://octopart.com:443/opatz8j6/c1?t=KvmM_VB597wQBZ0EFQPHsqthghnk-CyKJREKVm4-BDXmbtmDbIPXrgVDpL1D_aH_vnWAURhYsNjLM_wr8Sk9hjyk0XVYi62MVHONNwuLkuQfcs2d_AabwFAe876Z4ACeuShE7C090wiuQhW4jcmNrxJGoMTa6mNLLVS96SYx4do0OhlkfAj24S1WZ0GsIWguWcbfpf-cmY33Q4b-vxROzlpdDoTdAyy_qjxrfJFClswfFE-i-iVByVygRjjILC3nYwzEIjO0c9zvWRVgAPawcsrWqWG3mS_gkNhm4Qnvw1r-XroZnlSa1hwEgAiWWj5WXGwF_kqFHmXIh0noM3HnOQZrxRrI52p4&src-supplier=Compliance+Statements, ComponentLink25Description=https://octopart.com:443/opatz8j6/c1?t=uOhYe2Jawcctghz4mKhJ98kIbVsI5ED9pqTmDSKxLYXIKYqpghocA1lnybhK9am65mvb_YCk3Jvjyj3JJOfhznG0oLXyYpwJxu_8mTk6DkWQkBA2i_1NfFnZMOqtjH_MUTTMLpU-QZ8fjXGrXVFeXJ37PDEddO-4mwadv0CO-ALWfzuVMl26z4aszS46tQJdUOjNljsrosUX6F91fOZ37TUehcc6zwW-ziPUalX6EhdO11XH1nQqUTw5A2G78p7BN6B6zLOPrSzoRKL9ga1PRcdjxlYwUQu2bO79fsyUZQHq4d3r7cOvUHgcnTeuNwg21nd4bQpIT2Nkon0a2SKSu96hFEI&src-supplier=Compliance+Statements, ComponentLink25URL=https://octopart.com:443/opatz8j6/c1?t=uOhYe2Jawcctghz4mKhJ98kIbVsI5ED9pqTmDSKxLYXIKYqpghocA1lnybhK9am65mvb_YCk3Jvjyj3JJOfhznG0oLXyYpwJxu_8mTk6DkWQkBA2i_1NfFnZMOqtjH_MUTTMLpU-QZ8fjXGrXVFeXJ37PDEddO-4mwadv0CO-ALWfzuVMl26z4aszS46tQJdUOjNljsrosUX6F91fOZ37TUehcc6zwW-ziPUalX6EhdO11XH1nQqUTw5A2G78p7BN6B6zLOPrSzoRKL9ga1PRcdjxlYwUQu2bO79fsyUZQHq4d3r7cOvUHgcnTeuNwg21nd4bQpIT2Nkon0a2SKSu96hFEI&src-supplier=Compliance+Statements, ComponentLink26Description=https://octopart.com:443/opatz8j6/c1?t=EDHxwPE2je-o6UoAr6mAQZ70Us-VrEX067qa7gc9vdbWBSc27_wbB_0wvYJpL_D3_H4V9pBR3LUm0VcYJrLQcDBJtQAy8ECUFTXkmzdcDdaxGQ3_YLN3T2KwBhoo-bEVr6Cyzxfmr5aai1eisSa1xopwsbRQJcIdZneJ6K4wRLSnpqDFWxN1uIsbV_Bx9RjY4LRVKvKXk5QgYoXY7e8MnvB4g_nZt6Xk3LuEHOE8iMZvQFgsnKKReGm0RTBKWD6D5HWqiL0V-uYv7qLAis3DLm9PHVQBQzZ5M2_NjYDYAclBPHvL1txxe7AKJT0lCPkPTADH2LDSJtetMBOrQo68Qg7NQc5U6nx-&src-supplier=Compliance+Statements, ComponentLink26URL=https://octopart.com:443/opatz8j6/c1?t=EDHxwPE2je-o6UoAr6mAQZ70Us-VrEX067qa7gc9vdbWBSc27_wbB_0wvYJpL_D3_H4V9pBR3LUm0VcYJrLQcDBJtQAy8ECUFTXkmzdcDdaxGQ3_YLN3T2KwBhoo-bEVr6Cyzxfmr5aai1eisSa1xopwsbRQJcIdZneJ6K4wRLSnpqDFWxN1uIsbV_Bx9RjY4LRVKvKXk5QgYoXY7e8MnvB4g_nZt6Xk3LuEHOE8iMZvQFgsnKKReGm0RTBKWD6D5HWqiL0V-uYv7qLAis3DLm9PHVQBQzZ5M2_NjYDYAclBPHvL1txxe7AKJT0lCPkPTADH2LDSJtetMBOrQo68Qg7NQc5U6nx-&src-supplier=Compliance+Statements, ComponentLink27Description=https://octopart.com:443/opatz8j6/c1?t=Uq4Sk6z_xSWIMqiXgn20KlGgcd0VWqGQkjJdWtFNU7fw7fmf2lLIEPVQd2q4s0WoXzSmqu2aO0yYxKKKw9h9SkTGh2XwEIxynzaqSg1-YlEnpILESol-p-3F5L4RwI8_FUXD2YeH1GKbiYkd4CornLurjnr8ALSxErsg63z_mU6kuw_BQ9V72kRYwM7u6cwYXJpi3WozrEPAE98BrNeT2SU_W_Vuce9pNvQ0JrnErH_BDhQVQltL9eu3cm7_SZ_2ceWpehM3jFpPg1WQdQnQRdDo0DmwAjhFHImMqt9cCCD8QufZXwnKo7AtUWaJRlu-vPpV3ndpuIsCj5r4b1VBADTvMXw&src-supplier=Compliance+Statements, ComponentLink27URL=https://octopart.com:443/opatz8j6/c1?t=Uq4Sk6z_xSWIMqiXgn20KlGgcd0VWqGQkjJdWtFNU7fw7fmf2lLIEPVQd2q4s0WoXzSmqu2aO0yYxKKKw9h9SkTGh2XwEIxynzaqSg1-YlEnpILESol-p-3F5L4RwI8_FUXD2YeH1GKbiYkd4CornLurjnr8ALSxErsg63z_mU6kuw_BQ9V72kRYwM7u6cwYXJpi3WozrEPAE98BrNeT2SU_W_Vuce9pNvQ0JrnErH_BDhQVQltL9eu3cm7_SZ_2ceWpehM3jFpPg1WQdQnQRdDo0DmwAjhFHImMqt9cCCD8QufZXwnKo7AtUWaJRlu-vPpV3ndpuIsCj5r4b1VBADTvMXw&src-supplier=Compliance+Statements, Inside Diameter=4mm, Lifecycle Status=Production, Manufacturer Part Number=PJ-025, Mounting Technology="Through Hole", Number of Conductors=2, Outside Diameter=7mm, Pricing="1=0.3382, 360=0.326, 600=0.316, 1080=0.31, 2520=0.303 (USD)", REACH SVHC=Yes, RoHS=Compliant, Schedule B="8536695050, 8536695050|8536695050|8536695050|8536695050|8536695050|8536695050|8536695050|8536695050|8536695050|8536695050|8536695050|8536695050|8536695050|8536695050|8536695050|8536695050|8536695050|8536695050|8536695050|8536695050|8536695050|8536695050|8536695050, 8536695050|8536695050|8536695050|8536695050|8536695050|8536695050|8536695050|8536695050|8536695050|8536695050|8536695050|8536695050|8536695050|8536695050|8536695050|8536695050|8536695050|8536695050|8536695050|8536695050|8536695050|8536695050|8536695050|85", Shielding=No, Stock=5127, Supplier="Arrow Electronics", Supplier 1=DigiKey, Supplier Part Number=PJ-025, Voltage Rating (DC)=24V
J3: "Conn Umc Jack Str SMD", Manufacturer="TE Connectivity / Linx Technologies", Supplier Part Number=343-CONMHF1-SMD-TCT-ND, Category="RF / Coaxial Connectors", ComponentLink1Description=https://datasheet.octopart.com:443/CONMHF1-SMD-T-TE-Connectivity---Linx-Technologies-datasheet-175778997.pdf?src-supplier=Electro+Sonic, ComponentLink1URL=https://datasheet.octopart.com:443/CONMHF1-SMD-T-TE-Connectivity---Linx-Technologies-datasheet-175778997.pdf?src-supplier=Electro+Sonic, ComponentLink2Description=https://datasheet.octopart.com:443/CONMHF1-SMD-T-TE-Connectivity---Linx-Technologies-datasheet-178205583.pdf?src-supplier=Electro+Sonic, ComponentLink2URL=https://datasheet.octopart.com:443/CONMHF1-SMD-T-TE-Connectivity---Linx-Technologies-datasheet-178205583.pdf?src-supplier=Electro+Sonic, ComponentLink3Description=https://datasheet.octopart.com:443/CONMHF1-SMD-T-Linx-Technologies-datasheet-159768554.pdf?src-supplier=TME, ComponentLink3URL=https://datasheet.octopart.com:443/CONMHF1-SMD-T-Linx-Technologies-datasheet-159768554.pdf?src-supplier=TME, Manufacturer Part Number=CONMHF1-SMD-T, Pricing="1=0.2 (USD)", Stock=3907, Supplier=DigiKey, Supplier 1=DigiKey, Supplier Part Number 1=343-CONMHF1-SMD-TCT-ND
U1: "Espressif ESP32-S3-DevKitC-1-N8R8 PCB Board Wi-Fi BT USB Type-C DevKit", Manufacturer="Espressif Systems", Manufacturer Part Number=ESP32-S3-DEVKITC-1-N8R8, Supplier Part Number=1965-ESP32-S3-DEVKITC-1-N8R8-ND, Supplier Part Number 1=356-EP32S3DVKTC1N8R8, Category="NFC / RFID Components", ComponentLink1Description=https://datasheet.octopart.com:443/ESP32-S3-DEVKITC-1-N8R8-Espressif-Systems-datasheet-188867343.pdf?src-supplier=TME, ComponentLink1URL=https://datasheet.octopart.com:443/ESP32-S3-DEVKITC-1-N8R8-Espressif-Systems-datasheet-188867343.pdf?src-supplier=TME, ComponentLink2Description=https://datasheet.octopart.com:443/ESP32-S3-DEVKITC-1-N8R8-Espressif-Systems-datasheet-165560559.pdf?src-supplier=TME, ComponentLink2URL=https://datasheet.octopart.com:443/ESP32-S3-DEVKITC-1-N8R8-Espressif-Systems-datasheet-165560559.pdf?src-supplier=TME, Pricing="1=15 (USD)", RoHS=Compliant, Supplier=DigiKey, Supplier 1=Mouser
U2: "1A 60dB@(120Hz) Fixed 3.3V Positive 18V SOT-223 Linear Voltage Regulators (LDO) ROHS", Manufacturer="UMW(Youtai Semiconductor Co., Ltd.)", Supplier Part Number=4518-AMS1117-3.3CT-ND, Category="LDO Voltage Regulators", Manufacturer Part Number=AMS1117-3.3, Pricing="1=0,29, 10=0,2, 25=0,1772, 100=0,1524, 250=0,14044, 500=0,13324, 1000=0,12732 (USD)", Stock=6584, Supplier=DigiKey, Supplier 1=DigiKey, Supplier Part Number 1=4518-AMS1117-3.3CT-ND

## Via types
v1: diameter 0.508, hole 0.254, Top Layer to Bottom Layer, tented both sides, 22 vias

## Nets (pads, with @x,y where several pads share a name; then routed paths per layer and width w, separated by ;. In a path a pad name is that pad's centre, name@x,y a point inside that pad or via, vN(x,y) a via of type N, cw(c..) or ccw(c..) an arc to the next point about the centre after c; other vN are vias at no path point)
ANT: J3.1 U3.21 | length 20.7
  Top Layer w0.896: J3.1 67.9,64.044 68.724,64.868 69.813,64.868 U3.21
BUSY: U1.11 U3.14 | length 5.1
  Top Layer w0.254: U1.11 65.184,78.58 65.629,78.135 U3.14@69.75,78.135
DIO1: U1.10 U3.13 | length 5.6
  Top Layer w0.254: U1.10 66.555,79.405 U3.13@69.75,79.405
DIO2: U1.34 U3.8 | length 5.8
  Top Layer w0.254: U3.8@82.65,76.865 84.585,76.865 86.3,78.58 U1.34
DIO3: U1.31 U3.5 | length 5.9
  Top Layer w0.254: U3.5@82.65,73.055 84.697,73.055 86.706,71.046 87.614,71.046 U1.31
GND: C1.1 C2.1 J1.1 J2.1 J3.2 J3.3 J3.4 U1.22 U1.23 U1.24 U3.1 U3.2 U3.3 U3.4 U3.10 U3.11 U3.12 U3.20 U3.22 | length 21.6
  Top Layer w0.254: v1(65.3,44.15) J3.2 ; v1(67.9,41.425) J3.4 ; v1(67.95,80.65) 67.95,80.675 U3.12@69.75,80.675 ; v1(68.05,66.225) 68.05,66.215 U3.20@69.75,66.215 ; J3.3 70.461,44.15 v1(70.461,44.163) ; U3.22@69.75,63.675 69.825,63.6 v1(69.825,62.55) ; v1@71.975,52.7 C2.1@73.05,52.7 ; v1(72,58.4) C1.1 ; U3.1@82.65,63.675 v1(84.5,63.675) ; U3.2@82.65,64.945 84.5,64.945 v1(84.5,64.95) ; U3.3@82.65,66.215 84.45,66.215 v1(84.45,66.25) ; U3.4@82.65,71.785 84.425,71.785 v1(84.425,71.8) ; U3.10@82.65,79.405 82.652,79.402 84.548,79.402 v1(84.55,79.4) ; U3.11@82.65,80.675 82.662,80.662 84.538,80.662 v1(84.55,80.65) ; J2.1@83.05,36.05 J2.1
  other v1: 72,52.7
MISO: U1.19 U3.16 | length 20.3
  Top Layer w0.254: U1.19 64.88,58.3 64.88,59.403 66.975,61.498 66.975,64.736 67.475,65.236 67.475,74.95 68.12,75.595 U3.16@69.75,75.595
MOSI: U1.17 U3.17 | length 15.5
  Top Layer w0.254: U1.17 65.876,63.34 66.025,63.489 66.025,65.325 66.425,65.725 66.425,74.275 v1(66.45,74.3) ; v1(67.983,74.325) U3.17@69.75,74.325
  Bottom Layer w0.254: v1(66.45,74.3) 66.462,74.313 67.971,74.313 v1(67.983,74.325)
NetC2_2: C2.2 D1.2 D2.2 U2.2 U2.4 | length 25.2
  Top Layer w0.254: U2.4 76.4,55.6 74.65,53.85 C2.2 74.65,49.75 75.4,49 D1.2 D2.2
NSS: U1.16 U3.19 | length 9
  Top Layer w0.254: U1.16 64.86,65.88 65.805,66.825 v1(65.825,66.825) ; v1(67.983,71.755) 67.998,71.77 69.735,71.77 U3.19@69.75,71.785
  Bottom Layer w0.254: v1(65.825,66.825) 67.983,68.983 v1(67.983,71.755)
RST: U1.12 U3.15 | length 5.3
  Top Layer w0.254: U1.12 65.665,76.865 U3.15@69.75,76.865
RX: U1.32 U3.6 | length 5.4
  Top Layer w0.254: U3.6@82.65,74.325 85.95,74.325 86.706,73.569 87.631,73.569 U1.32
SCK: U1.18 U3.18 | length 16.3
  Top Layer w0.254: U1.18 65.052,61.012 65.737,61.012 66.575,61.85 66.575,65.125 66.967,65.517 v1(66.967,73) ; v1(67.983,73.027) 67.997,73.041 69.736,73.041 U3.18@69.75,73.055
  Bottom Layer w0.254: v1(66.967,73) 66.981,73.014 67.969,73.014 v1(67.983,73.027)
TX: U1.33 U3.7 | length 5.2
  Top Layer w0.254: U3.7@82.65,75.595 86.015,75.595 86.46,76.04 U1.33
V_SOLAR: D2.1 J2.3 | length 9.1
  Top Layer w0.254: D2.1 84.2,39.3 87.6,35.9 J2.3
V_WALL: D1.1 J1.3 | length 8.3
  Top Layer w0.254: J1.3 75.4,34.5 D1.1
VCC: C1.2 U1.1 U1.2 U2.1 U3.9 | length 6.7
  Top Layer w0.254: C1.2 75.425,58.4 75.925,57.9 U2.1 v1(77.75,59.4) ; U3.9@82.65,78.135 v1(84.551,78.135)
pads on no net: J1. J1.2 J2. J2.2 U1.3 U1.4 U1.5 U1.6 U1.7 U1.8 U1.9 U1.13 U1.14 U1.15 U1.20 U1.21 U1.25 U1.26 U1.27 U1.28 U1.29 U1.30 U1.35 U1.36 U1.37 U1.38 U1.39 U1.40 U1.41 U1.42 U1.43 U1.44 U2.3

## Polygon pours and split planes (outlines as drawn)
GND on Bottom Layer "GND_L02_P002" (solid, pour order 2): 62.9,25.3 62.9,106.1 89.6,106.1 89.6,25.3
VCC on Top Layer "VCC_L01_P001" (solid, pour order 1): 62.9,49.05 62.9,106.1 89.6,106.1 89.6,49.05

## Silkscreen, mask and mechanical layers (free items; w line width, h text height)
Top Overlay:
  drawing of 20 lines, arcs and shapes, not listed
  text "LoRA Module" at 73,84.02 h2
  text "DIO1" at 66.6,81.21 h0.8
  text "DIO2" at 84.8,78.407 h0.6
  text "BUSY" at 66.6,78.31 h0.8
  text "TX" at 85.1,75.8 h0.8
  text "RST" at 66.6,75.71 h0.8
  text "RX" at 85,73.2 h0.8
  text "DIO3" at 84.4,70.71 h0.8
  text "NSS" at 66.6,65.41 h0.8
  text "MOSI" at 66.6,63.11 h0.8
  text "SCK" at 66.6,60.61 h0.8
  text "MISO" at 66.6,58.01 h0.8
  text "U.FL CONN" at 65.5,40.112 h1
  text "GRID" at 67.2,37.424 h2
  text "SOLAR" at 80,37.424 h2
Board Shape:
  lines w0.254: 89.4,25.4 63,25.4 63,106 89.5,106 89.5,25.4

## Text inside footprints (layer, text, board x,y; h text height)
D1: Top 3D Body "1" at 75.654,40.925 h1 r90
D2: Top 3D Body "1" at 84.454,40.925 h1 r90
U2: Top 3D Body "1" at 79.303,57.632 h1
U3: Top 3D Body "1" at 81.065,63.35 h1